# Allegro board demob22.brd
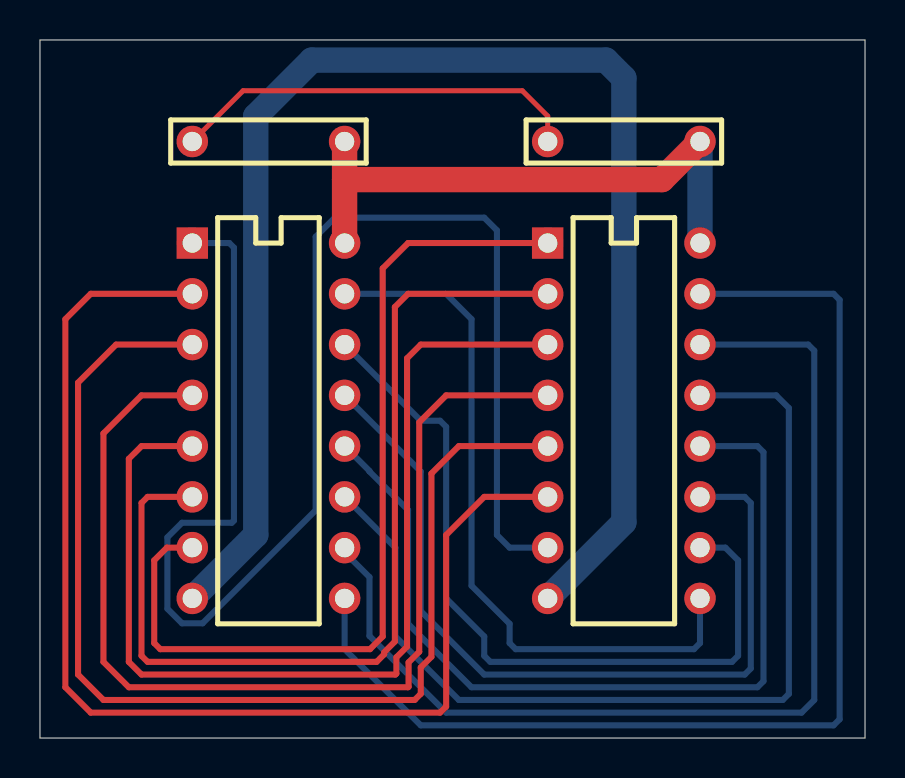
[diagram p0: board, top side]
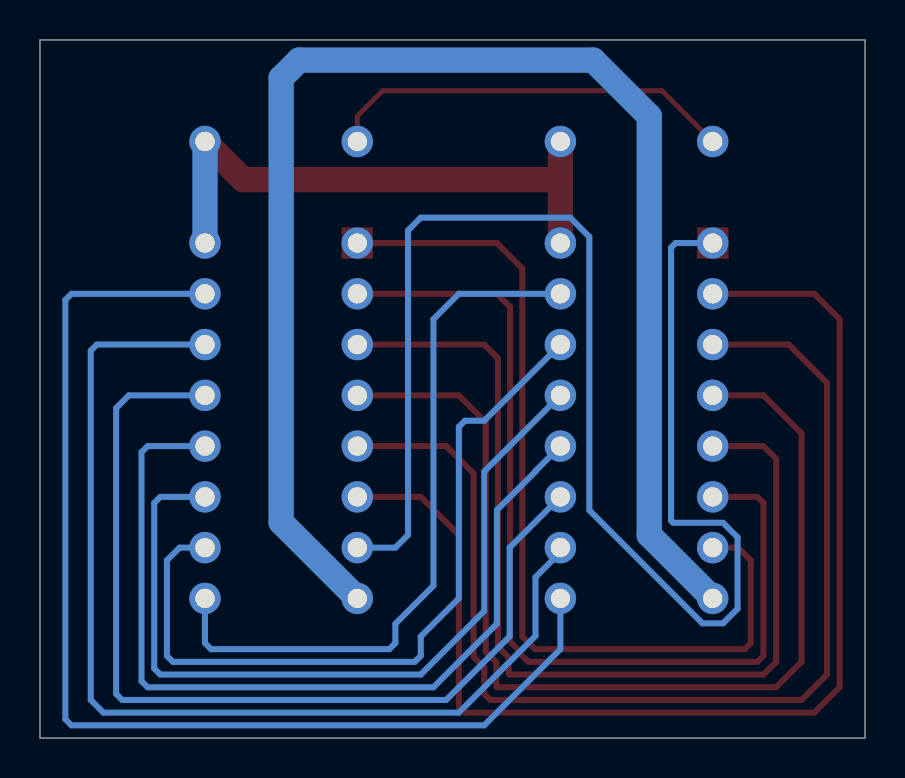
[diagram p1: board, bottom side, seen from below]

Outline 41.27 x 34.93 mm; copper layers: TOP, GND, POWER, INNER1, INNER2, BOTTOM. Coordinates in mm from the lower left corner of the outline.
Outline path: 0,34.93 41.27,34.93 41.27,0 0,0 0,34.93

## Design rules (mm)
nets with their own width: min track width 0.254; nets GND_SIGNAL
nets with their own width: min track width 0.305; nets N01899 N01900 N01901 N01902 N01903 N01904 N01905 N01906 N01907 N01908 N01909 N01910 N01911 N01912
nets with their own width: min track width 1.27; nets GND VCC

## Placement (name value [footprint] x y rotation side)
C1  CAP NP  [AC300100A]  15.24 29.85 180 top
C2  CAP NP  [AC300100A]  33.02 29.85 180 top
U1  74LS158  [DIP16]  7.62 24.77 270 top
U2  74LS158  [DIP16]  25.4 24.77 270 top

## Library data of the parts
C1 C2 = CAP_NP
U1 U2 = 74LS158

## Footprints (pads in the part's own frame, mm; a bottom-side part is the same pattern mirrored in y, then rotated)
AC300100A
  round 1.575 hole 0.965: 1(0,0) 2(7.62,0)
DIP16
  rect 1.575x1.575 hole 0.965: 1(0,0)
  round 1.575 hole 0.965: 2(2.54,0) 3(5.08,0) 4(7.62,0) 5(10.16,0) 6(12.7,0) 7(15.24,0) 8(17.78,0) 9(17.78,7.62) 10(15.24,7.62) 11(12.7,7.62) 12(10.16,7.62) 13(7.62,7.62) 14(5.08,7.62) 15(2.54,7.62) 16(0,7.62)

## Nets
GND: U1.8(TP-8) U2.8(TP-8)
GND_SIGNAL: C1.2(TP-2) C2.2(TP-2)
VCC: C1.1(TP-1) C2.1(TP-1) U1.16(TP-16) U2.16(TP-16)
N01899: U1.2(TP-2) U2.6(TP-6)
N01900: U1.3(TP-3) U2.5(TP-5)
N01901: U1.4(TP-4) U2.4(TP-4)
N01902: U1.5(TP-5) U2.3(TP-3)
N01903: U1.6(TP-6) U2.2(TP-2)
N01904: U1.7(TP-7) U2.1(TP-1)
N01905: U1.9(TP-9) U2.15(TP-15)
N01906: U1.10(TP-10) U2.14(TP-14)
N01907: U1.11(TP-11) U2.13(TP-13)
N01908: U1.12(TP-12) U2.12(TP-12)
N01909: U1.14(TP-14) U2.10(TP-10)
N01910: U1.1(TP-1) U2.7(TP-7)
N01911: U1.13(TP-13) U2.11(TP-11)
N01912: U1.15(TP-15) U2.9(TP-9)

## Routing (per net, layer and track width the routed paths; a pad name or vN(x,y) marks a point on that pad's centre or on a via; arc(x,y) is an arc through that point)
GND: length 73
  BOTTOM w1.27: U1.8 10.79,10.16 10.79,31.11 13.6,33.92 28.31,33.92 29.21,33.02 29.21,10.8 U2.8
GND_SIGNAL: length 20.6
  TOP w0.254: C2.2 25.4,31.11 24.13,32.39 10.16,32.39 C1.2
VCC: length 28.7
  TOP w1.27: 15.24,27.94 U1.16 ; 15.24,27.94 31.11,27.94 C2.1 ; 15.24,27.94 C1.1
  BOTTOM w1.27: C2.1 U2.16
N01899: length 59.4
  TOP w0.305: U2.6 22.23,12.07 20.32,10.16 20.32,1.57 20.02,1.27 2.54,1.27 1.27,2.54 1.27,20.95 2.54,22.22 U1.2
N01900: length 56.5
  TOP w0.305: U1.3 3.81,19.68 1.91,17.78 1.91,3.17 3.17,1.91 18.75,1.91 19.05,2.21 19.05,3.53 19.58,4.06 19.58,13.23 20.95,14.61 U2.5
N01901: length 52.9
  TOP w0.305: U1.4 5.08,17.14 3.17,15.24 3.17,3.81 4.45,2.54 18.41,2.54 18.44,2.57 18.44,3.78 18.97,4.32 18.97,15.8 20.32,17.14 U2.4
N01902: length 50.6
  TOP w0.305: U2.3 19.05,19.68 18.36,19 18.36,4.57 17.83,4.04 17.83,3.23 17.78,3.17 5.08,3.17 4.45,3.81 4.45,13.97 5.08,14.61 U1.5
N01903: length 48.3
  TOP w0.305: U2.2 18.41,22.22 17.75,21.56 17.75,4.83 17.22,4.29 17.22,4.19 16.84,3.81 5.38,3.81 5.08,4.11 5.08,11.76 5.38,12.07 U1.6
N01904: length 45.3
  TOP w0.305: U2.1 18.41,24.77 17.14,23.5 17.14,5.08 16.51,4.45 6.02,4.45 5.71,4.75 5.71,8.89 6.35,9.52 U1.7
N01905: length 57.1
  BOTTOM w0.305: U1.9 15.24,4.45 19.05,0.64 39.7,0.64 40.01,0.94 40.01,21.92 39.7,22.22 U2.15
N01906: length 52.4
  BOTTOM w0.305: U1.10 15.59,9.18 15.59,8.95 16.48,8.05 16.48,5.11 20.32,1.27 38.1,1.27 38.73,1.91 38.73,19.38 38.43,19.68 U2.14
N01907: length 48.2
  BOTTOM w0.305: U1.11 17.78,9.52 17.78,5.08 20.95,1.91 37.16,1.91 37.47,2.21 37.47,16.51 36.83,17.14 U2.13
N01908: length 44.2
  BOTTOM w0.305: U2.12 35.89,14.61 36.2,14.3 36.2,2.84 35.89,2.54 21.59,2.54 18.41,5.72 18.41,11.4 16.48,13.34 16.48,13.36 U1.12
N01909: length 38.9
  BOTTOM w0.305: U1.14 19.05,15.88 20.02,15.88 20.32,15.57 20.32,6.99 22.23,5.08 22.23,4.11 22.53,3.81 34.62,3.81 34.92,4.11 34.92,8.89 34.29,9.52 U2.10
N01910: length 74.6
  BOTTOM w0.305: U1.1 9.47,24.77 9.7,24.54 9.7,10.88 9.59,10.77 7.1,10.77 6.38,10.04 6.38,6.47 7.1,5.74 8.14,5.74 13.79,11.4 13.79,25.08 14.75,26.04 22.23,26.04 22.86,25.4 22.86,10.16 23.5,9.52 U2.7
N01911: length 41.3
  BOTTOM w0.305: U2.11 35.26,12.07 35.56,11.76 35.56,3.48 35.26,3.17 22.23,3.17 19.05,6.35 19.05,13.34 U1.13
N01912: length 35.9
  BOTTOM w0.305: U1.15 20.32,22.22 21.59,20.95 21.59,7.62 23.5,5.72 23.5,4.75 23.8,4.45 32.72,4.45 33.02,4.75 U2.9
